# EAGLE board team dashboard display (EAGLE 9.6.2)
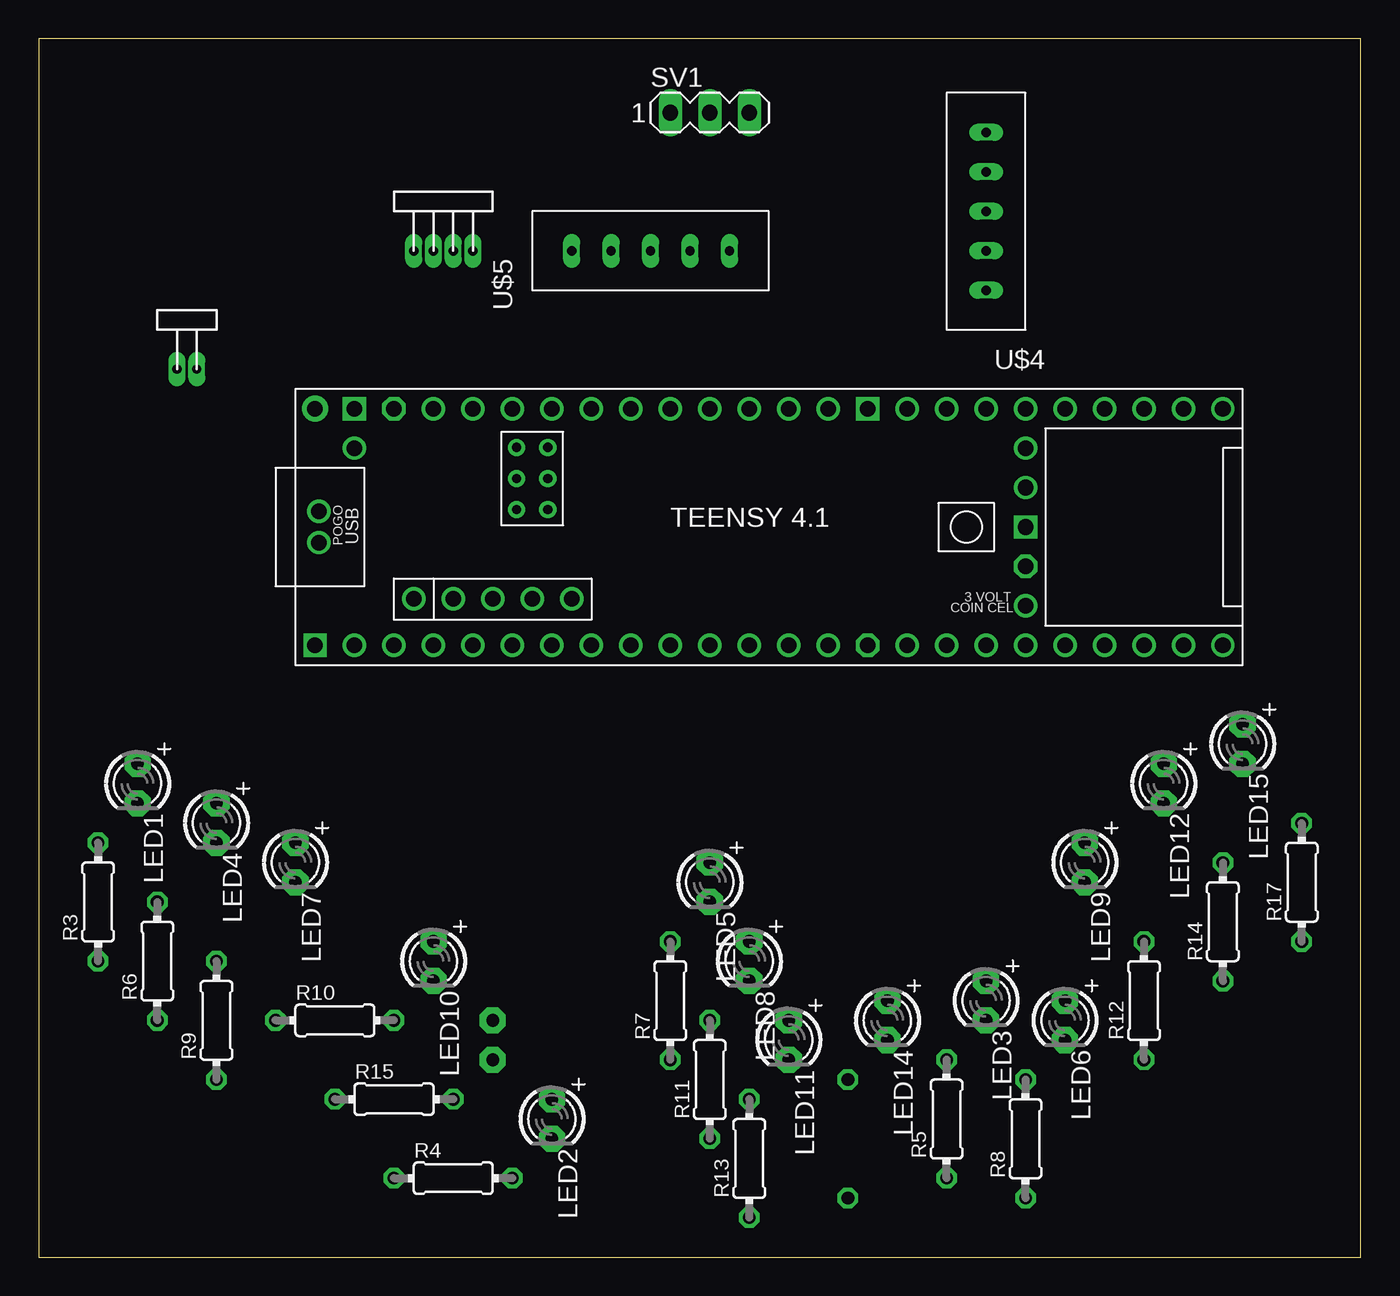
[diagram p0: board, top side]
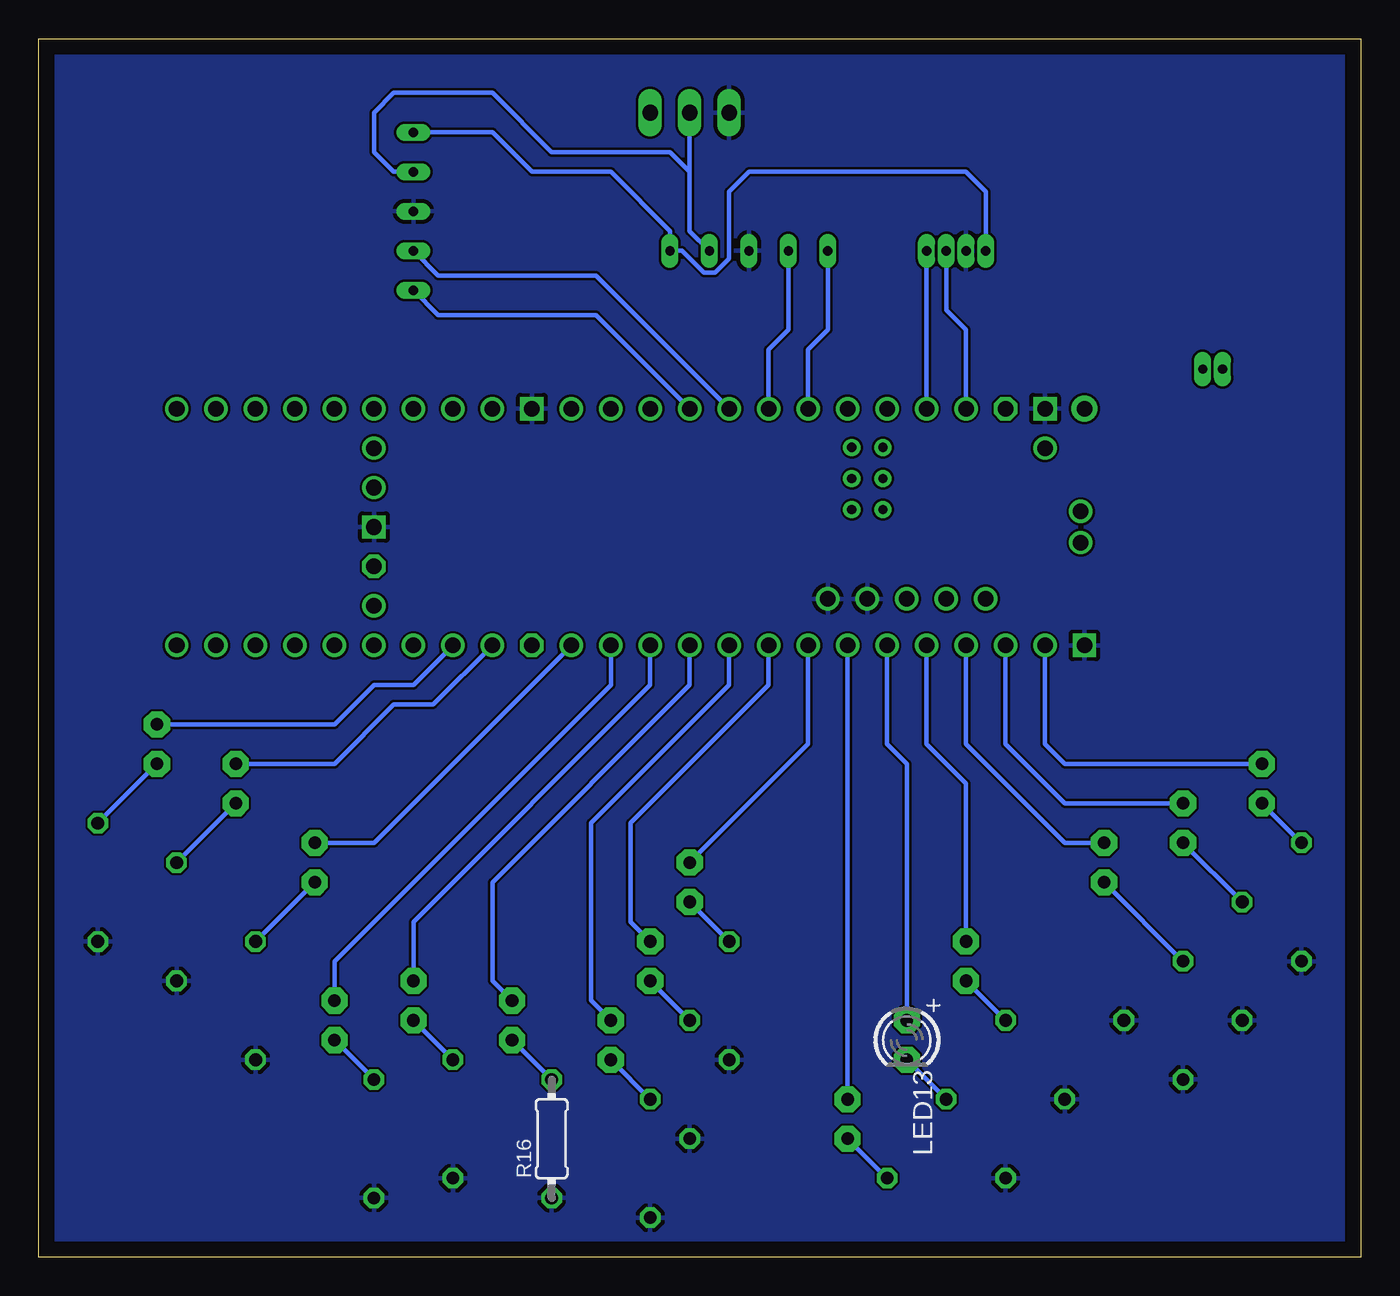
[diagram p1: board, bottom side, seen from below]

Size 85.07 x 78.41 mm. Coordinates in mm from the lower left corner, seen from the top.
Outline: 0,0 85.07,0 85.07,78.41 0,78.41 0,0
Copper layers (1*16): Top 0.035mm / dielectric 1.5mm / Bottom 0.035mm
Design rules "default": minimum track width 6mil, minimum drill 0.35mm, track to track 6mil, track to pad 6mil, pad to pad 6mil, via to via 6mil, smd to smd 6mil, copper to edge 40mil, drill to drill 6mil, minimum pad ring 10mil, minimum via ring 8mil, stop-mask expansion 4mil, vias tented up to drill 0mil, thermal gap 10mil

## Footprints (pad centres in the part's own frame; a part is rotated, then mirrored left to right if it is on the bottom)
LED3MM = drill 0.813 pad 1.676 octagon: A -1.27,0; K 1.27,0
0204/7 = drill 0.813 octagon: 1 -3.81,0; 2 3.81,0
MA03-1 = drill 1.016 long: 1 -2.54,0; 2 0,0; 3 2.54,0
TEENSY41 = drill 1: 0-RX1/CS1/CRX2 -27.94,-7.62; 1-TX1/MISO1/CTX2 -25.4,-7.62; 2-OUT2 -22.86,-7.62; 3-LRCLK2 -20.32,-7.62; 4-BCLK2 -17.78,-7.62; 5-IN2 -15.24,-7.62; 6-OUT1D -12.7,-7.62; 7-RX2/OUT1A -10.16,-7.62; 8-TX2/IN2 -7.62,-7.62; 9-OUT1C -5.08,-7.62; 10-CS\MQSR -2.54,-7.62; 11-MOSI/CTX1 0,-7.62; 12-MISO/MQSL 2.54,-7.62; 13-SCK/LED 2.54,7.62; 14-A0/TX3/SPDIF_OUT 0,7.62; 15-A1/RX3/SPDIF_IN -2.54,7.62; 16-A2/RX4/SCL1 -5.08,7.62; 17-A3/TX4/SDA1 -7.62,7.62; 18-A4/SDA0 -10.16,7.62; 19-A5/SCL0 -12.7,7.62; 20-A6/TX5/LRCLK1 -15.24,7.62; 21-A7/RX5/BCLK1 -17.78,7.62; 22-A8/CTX1 -20.32,7.62; 23-A9/CRX1/MCLK1 -22.86,7.62; 24-A10/TX6/SCL2 7.62,-7.62; 25-A11/RX6/SDA2 10.16,-7.62; 26-A12/MOSI1 12.7,-7.62; 27-A13/SCK1 15.24,-7.62; 28-RX7 17.78,-7.62; 29-TX7 20.32,-7.62; 30-CRX3 22.86,-7.62; 31-CTX3 25.4,-7.62; 32-OUT1B 27.94,-7.62; 33-MCLK2 27.94,7.62; 34-RX8 25.4,7.62; 35-TX8 22.86,7.62; 36-PWM 20.32,7.62; 37-PWM 17.78,7.62; 38-A14/CS/IN1 15.24,7.62; 39-A15/CS/OUT1A 12.7,7.62; 40-A16/CS1 10.16,7.62; 41-A17/MISO1 7.62,7.62; +5V -24.13,-4.62; D+ -30.25,-1; D- -30.25,1; DM -21.59,-4.62; DP -19.05,-4.62; GND4 -16.51,-4.62; GND5 -13.97,-4.62; ON/OFF 15.24,5.08; PROGRAM 15.24,2.54; VBAT 15.24,-5.08; VUSB -27.94,5.08 | drill 1 octagon: 3V3-1 5.08,-7.62; 3V3-2 15.24,-2.54; 3V3-3 -25.4,7.62 | drill 0.6: G -15.51,3.12; LED -17.51,3.12; R+ -17.51,5.12; R- -15.51,5.12; T+ -15.51,1.12; T- -17.51,1.12 | drill 1 square: GND1 -30.48,-7.62; GND2 15.24,0; GND3 5.08,7.62; GND6 -27.94,7.62 | drill 1 pad 1.676: VIN -30.48,7.62
5IL = drill 0.6 long: P$1 0,-5.08; P$2 0,-2.54; P$3 0,0; P$4 0,2.54; P$5 0,5.08
CAN_BUS = drill 0.6 long: P$2 3.81,2.54; P$3 5.08,2.54
CAN_TEN = drill 0.6 long: P$1 2.54,1.27; P$2 3.81,1.27; P$3 5.08,1.27; P$4 6.35,1.27

## Placement (x,y rotation side)
LED1  [LED3MM]  6.35,30.48 270 top
LED2  [LED3MM]  33.02,8.89 270 top
LED3  [LED3MM]  60.96,16.51 270 top
LED4  [LED3MM]  11.43,27.94 270 top
LED5  [LED3MM]  43.18,24.13 270 top
LED6  [LED3MM]  66.04,15.24 270 top
LED7  [LED3MM]  16.51,25.4 270 top
LED8  [LED3MM]  45.72,19.05 270 top
LED9  [LED3MM]  67.31,25.4 270 top
LED10  [LED3MM]  25.4,19.05 270 top
LED11  [LED3MM]  48.26,13.97 270 top
LED12  [LED3MM]  72.39,30.48 270 top
LED13  [LED3MM]  29.21,13.97 270 bottom
LED14  [LED3MM]  54.61,15.24 270 top
LED15  [LED3MM]  77.47,33.02 270 top
R3  47k  [0204/7]  3.81,22.86 90 top
R4  47k  [0204/7]  26.67,5.08 0 top
R5  47k  [0204/7]  58.42,8.89 90 top
R6  47k  [0204/7]  7.62,19.05 90 top
R7  47k  [0204/7]  40.64,16.51 90 top
R8  47k  [0204/7]  63.5,7.62 90 top
R9  47k  [0204/7]  11.43,15.24 90 top
R10  47k  [0204/7]  19.05,15.24 0 top
R11  47k  [0204/7]  43.18,11.43 90 top
R12  47k  [0204/7]  71.12,16.51 90 top
R13  47k  [0204/7]  45.72,6.35 90 top
R14  47k  [0204/7]  76.2,21.59 90 top
R15  47k  [0204/7]  22.86,10.16 0 top
R16  47k  [0204/7]  52.07,7.62 90 bottom
R17  47k  [0204/7]  81.28,24.13 90 top
SV1  [MA03-1]  43.18,73.66 0 top
U$2  TEENSY41  [TEENSY41]  48.26,46.99 0 top
U$4  1.2_7SEGMENTDISPLAY  [5IL]  60.96,67.31 180 top
U$5  1.2_7SEGMENTDISPLAY  [5IL]  39.37,64.77 90 top
U$8  CAN_BUS  [CAN_BUS]  5.08,54.61 0 top
U$9  CAN_TEE  [CAN_TEN]  21.59,63.5 0 top

## Library data of the parts
LED1-LED15 = adafruit
R3-R17 = rcl; SPICEPREFIX: R
SV1 = con-lstb; OC_FARNELL: unknown; OC_NEWARK: unknown
U$2 = teensy
U$4 U$5 = David_Pinlayouts
U$8 U$9 = F-E library custom components

## Nets
3.3V: U$4.P$1 U$5.P$1 U$9.P$1
5V: SV1.2 U$4.P$2 U$5.P$2
12V: SV1.3
A1-L1: LED1.A U$2.0-RX1/CS1/CRX2
A1-L2: LED4.A U$2.1-TX1/MISO1/CTX2
A1-L3: LED7.A U$2.2-OUT2
A1-L4: LED10.A U$2.3-LRCLK2
A1-L5: LED13.A U$2.4-BCLK2
A2-L1: LED2.A U$2.5-IN2
A2-L2: LED5.A U$2.6-OUT1D
A2-L3: LED8.A U$2.7-RX2/OUT1A
A2-L4: LED11.A U$2.8-TX2/IN2
A2-L5: LED14.A U$2.9-OUT1C
A3-L1: LED3.A U$2.10-CS\MQSR
A3-L2: LED6.A U$2.11-MOSI/CTX1
A3-L3: LED9.A U$2.12-MISO/MQSL
A3-L4: LED12.A U$2.24-A10/TX6/SCL2
A3-L5: LED15.A U$2.25-A11/RX6/SDA2
GND: R3.1 R4.1 R5.1 R6.1 R7.1 R8.1 R9.1 R10.1 R11.1 R12.1 R13.1 R14.1 R15.1 R16.1 R17.1 SV1.1 U$2.GND1 U$2.GND2 U$2.GND3 U$2.GND4 U$2.GND5 U$2.GND6 U$4.P$3 U$5.P$3 U$9.P$2
N$6: U$2.17-A3/TX4/SDA1 U$4.P$4
N$7: U$2.16-A2/RX4/SCL1 U$4.P$5
N$8: U$2.18-A4/SDA0 U$5.P$4
N$9: U$2.19-A5/SCL0 U$5.P$5
N$10: LED1.K R3.2
N$11: LED2.K R4.2
N$12: U$2.22-A8/CTX1 U$9.P$4
N$13: U$2.23-A9/CRX1/MCLK1 U$9.P$3
N$14: LED3.K R5.2
N$15: LED4.K R6.2
N$16: LED5.K R7.2
N$17: LED6.K R8.2
N$18: LED7.K R9.2
N$19: LED10.K R10.2
N$20: LED8.K R11.2
N$21: LED9.K R12.2
N$22: LED11.K R13.2
N$23: LED12.K R14.2
N$24: LED13.K R15.2
N$25: LED14.K R16.2
N$26: LED15.K R17.2

## Tracks (layer width: path | path; a pad name or v marks a point on that pad's centre or on a via)
3.3V
  Bottom 0.305: U$4.P$1 55.88,72.39 53.34,69.85 48.26,69.85 44.45,66.04 U$5.P$1 43.68,64.77 42.27,63.36 41.55,63.36 40.64,64.27 40.64,68.58 39.37,69.85 25.4,69.85 24.13,68.58 U$9.P$1
5V
  Bottom 0.305: U$5.P$2 43.18,66.04 43.18,69.85 | 43.18,69.85 SV1.2 | 43.18,69.85 44.45,71.12 52.07,71.12 55.88,74.93 62.23,74.93 63.5,73.66 63.5,71.12 62.23,69.85 U$4.P$2
A1-L1
  Bottom 0.305: U$2.0-RX1/CS1/CRX2 20.32,33.02 19.05,31.75 LED1.A
A1-L2
  Bottom 0.305: U$2.1-TX1/MISO1/CTX2 22.86,33.02 19.05,29.21 LED4.A
A1-L3
  Bottom 0.305: U$2.2-OUT2 25.4,33.02 19.05,26.67 LED7.A
A1-L4
  Bottom 0.305: U$2.3-LRCLK2 27.94,33.02 25.4,30.48 LED10.A
A1-L5
  Bottom 0.305: U$2.4-BCLK2 30.48,33.02 29.21,31.75 LED13.A
A2-L1
  Bottom 0.305: LED2.A U$2.5-IN2
A2-L2
  Bottom 0.305: LED5.A 35.56,33.02 U$2.6-OUT1D
A2-L3
  Bottom 0.305: LED8.A 46.99,21.59 46.99,27.94 38.1,36.83 U$2.7-RX2/OUT1A
A2-L4
  Bottom 0.305: LED11.A 49.53,16.51 49.53,27.94 40.64,36.83 U$2.8-TX2/IN2
A2-L5
  Bottom 0.305: U$2.9-OUT1C 43.18,36.83 55.88,24.13 55.88,17.78 LED14.A
A3-L1
  Bottom 0.305: U$2.10-CS\MQSR 45.72,36.83 60.96,21.59 LED3.A
A3-L2
  Bottom 0.305: U$2.11-MOSI/CTX1 48.26,36.83 66.04,19.05 LED6.A
A3-L3
  Bottom 0.305: LED9.A 63.5,26.67 U$2.12-MISO/MQSL
A3-L4
  Bottom 0.305: LED12.A 66.04,31.75 62.23,35.56 59.69,35.56 U$2.24-A10/TX6/SCL2
A3-L5
  Bottom 0.305: U$2.25-A11/RX6/SDA2 60.96,36.83 63.5,36.83 66.04,34.29 LED15.A
GND
  pour Bottom: 0,0 85.09,0 85.09,78.74 0,78.74
N$6
  Bottom 0.305: U$2.17-A3/TX4/SDA1 49.21,63.18 59.37,63.18 U$4.P$4
N$7
  Bottom 0.305: U$2.16-A2/RX4/SCL1 49.21,60.64 59.37,60.64 U$4.P$5
N$8
  Bottom 0.305: U$2.18-A4/SDA0 38.1,58.42 36.83,59.69 U$5.P$4
N$9
  Bottom 0.305: U$5.P$5 34.29,59.69 35.56,58.42 U$2.19-A5/SCL0
N$10
  Bottom 0.305: LED1.K R3.2
N$11
  Bottom 0.305: LED2.K R4.2
N$12
  Bottom 0.305: U$2.22-A8/CTX1 U$9.P$4
N$13
  Bottom 0.305: U$9.P$3 26.67,60.96 25.4,59.69 U$2.23-A9/CRX1/MCLK1
N$14
  Bottom 0.305: LED3.K R5.2
N$15
  Bottom 0.305: LED4.K R6.2
N$16
  Bottom 0.305: LED5.K R7.2
N$17
  Bottom 0.305: LED6.K R8.2
N$18
  Bottom 0.305: LED7.K R9.2
N$19
  Bottom 0.305: R10.2 LED10.K
N$20
  Bottom 0.305: R11.2 LED8.K
N$21
  Bottom 0.305: R12.2 LED9.K
N$22
  Bottom 0.305: LED11.K R13.2
N$23
  Bottom 0.305: R14.2 LED12.K
N$24
  Bottom 0.305: R15.2 LED13.K
N$25
  Bottom 0.305: LED14.K R16.2
N$26
  Bottom 0.305: R17.2 LED15.K